# EAGLE board ArduinoMegaConnector (EAGLE 5.07)
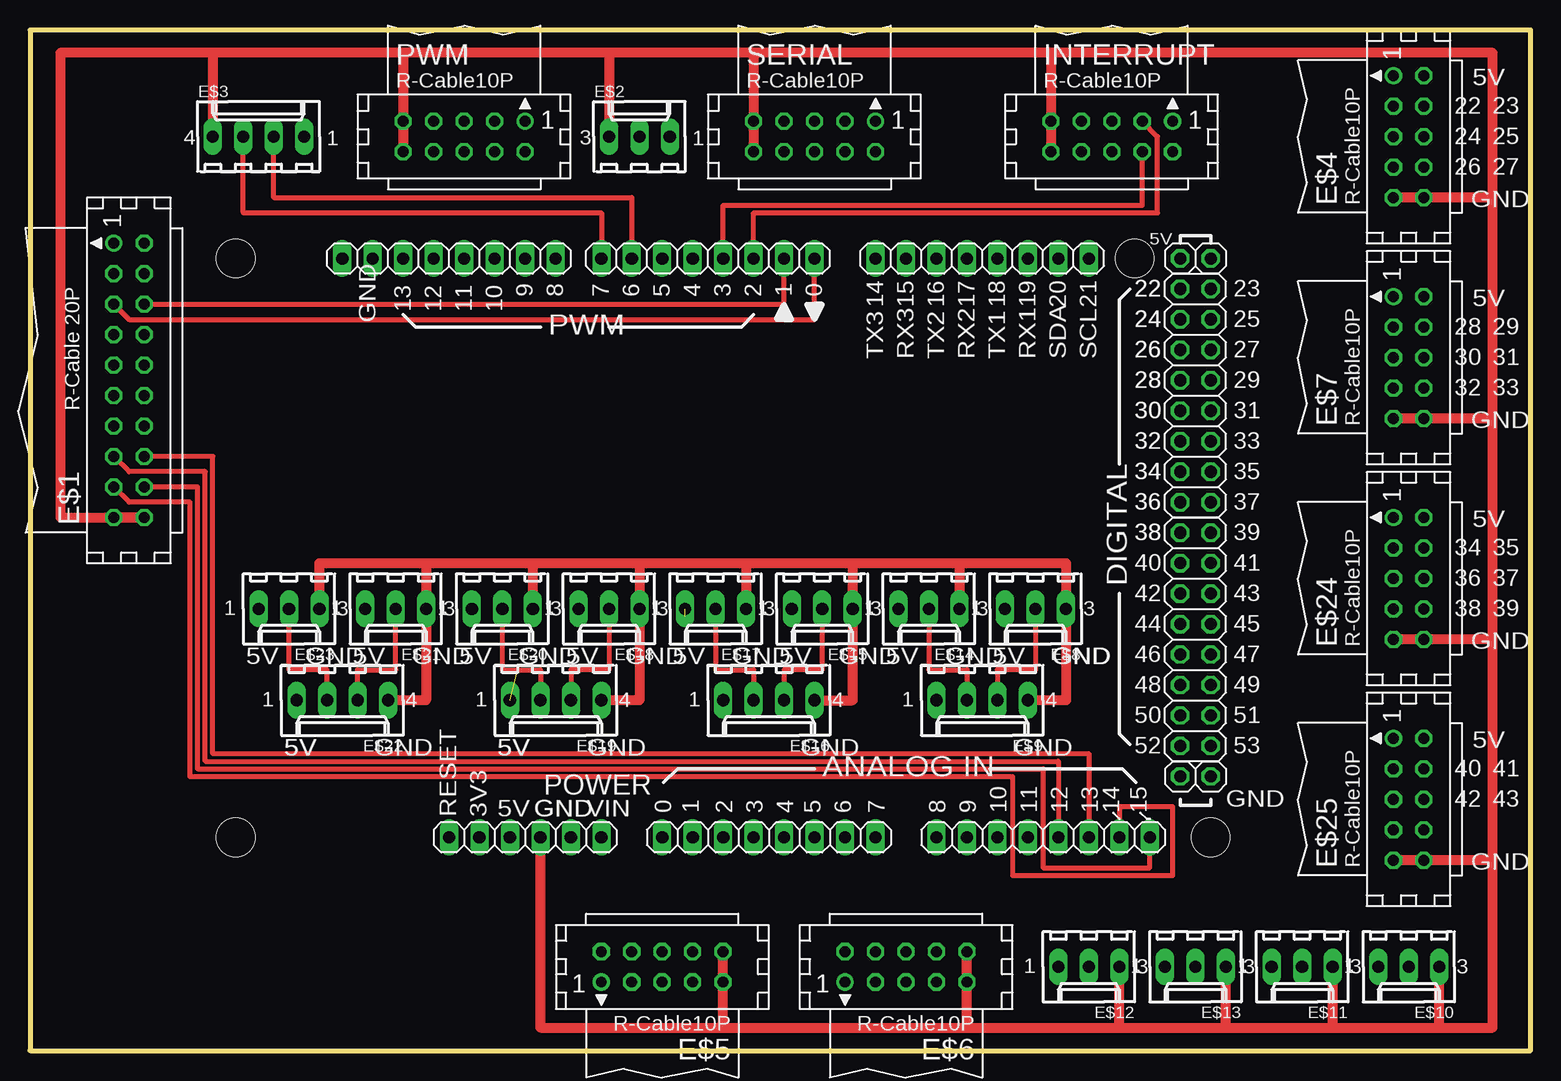
[diagram p0: board, top side]
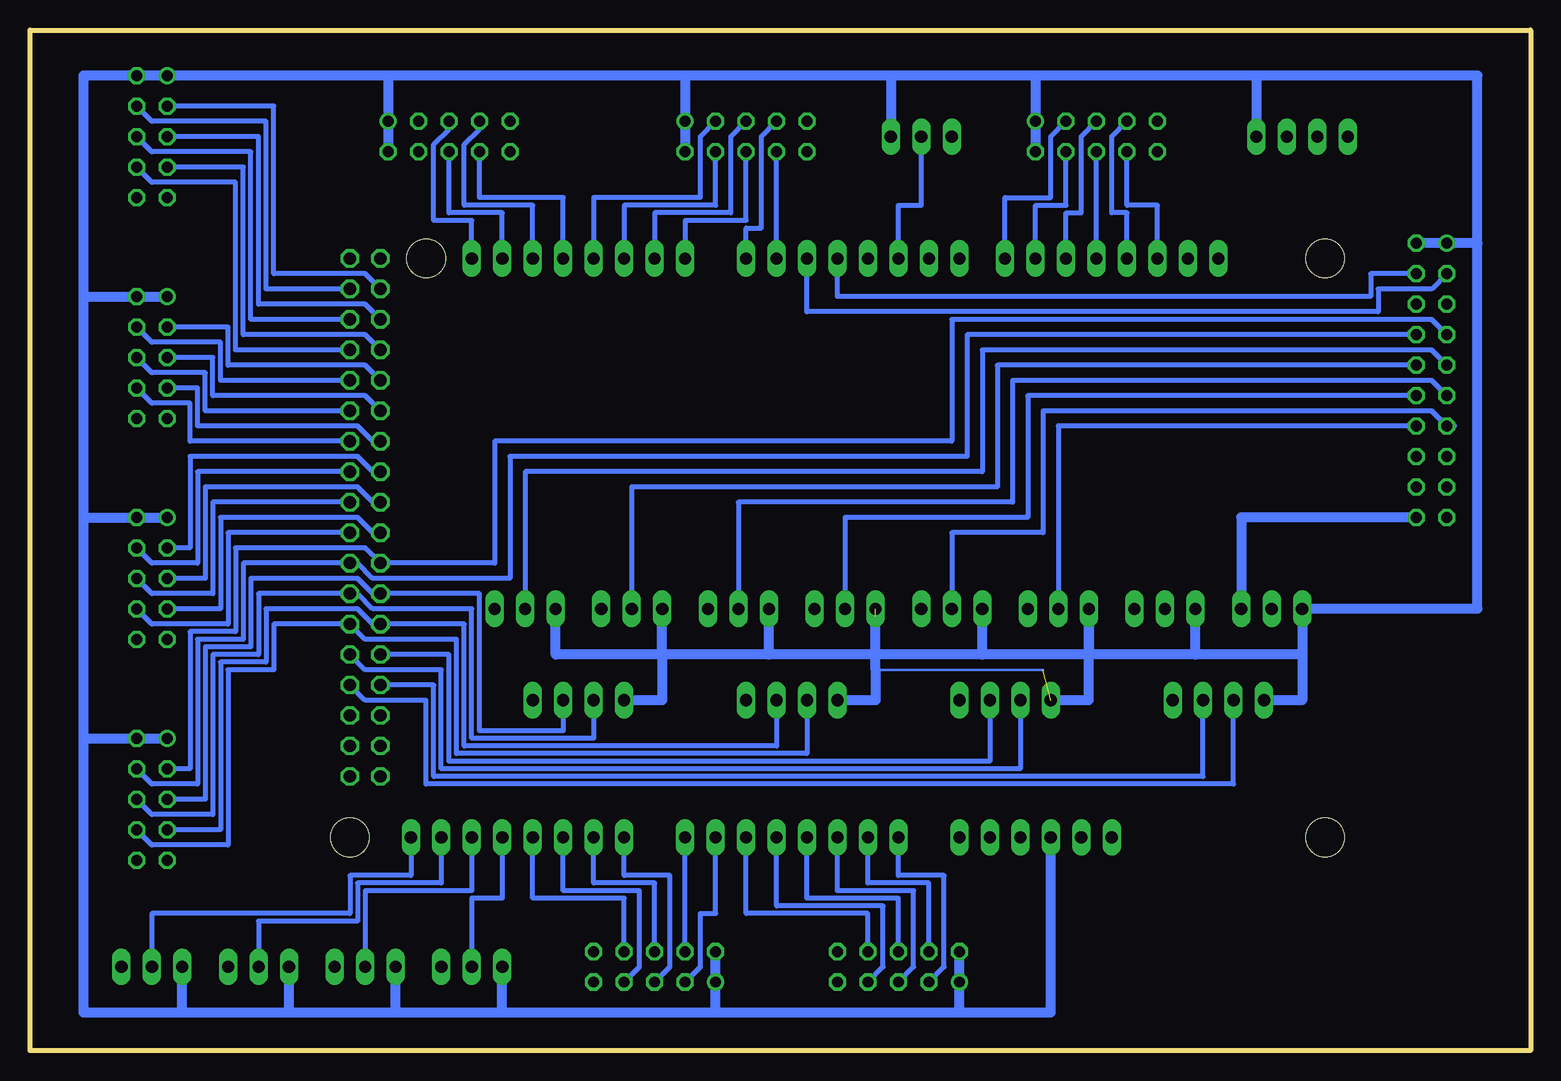
[diagram p1: board, bottom side, seen from below]

Size 125.09 x 85.09 mm. Coordinates in mm from the lower left corner, seen from the top.
Outline: 0,0 125.09,0 125.09,85.09 0,85.09 0,0
Copper layers (1*16): Top 0.035mm / dielectric 1.5mm / Bottom 0.035mm
Design rules "default *": minimum track width 8mil, minimum drill 16mil, track to track 8mil, track to pad 8mil, pad to pad 8mil, via to via 10mil, smd to smd 8mil, copper to edge 40mil, drill to drill 12mil, minimum pad ring 10mil, minimum via ring 10mil, stop-mask expansion 4mil, vias tented up to drill 0mil, thermal gap 10mil
Net classes: 0 default: width 0.203 mm, drill 0.406 mm, clearance 0.203 mm; 1 power: width 0.61 mm, drill 0.711 mm, clearance 0.203 mm; 2 gnd: width 0.305 mm, drill 0.711 mm, clearance 0.203 mm; 3 usbvcc: width 0.508 mm, drill 0.711 mm, clearance 0.203 mm
Holes 3.2 mm at 98.42,17.78 17.14,66.04 92.08,66.04 17.14,17.78

## Footprints (pad centres in the part's own frame; a part is rotated, then mirrored left to right if it is on the bottom)
1X08 = drill 1.016 long: 1 -8.89,0; 2 -6.35,0; 3 -3.81,0; 4 -1.27,0; 5 1.27,0; 6 3.81,0; 7 6.35,0; 8 8.89,0
CON20L = drill 0.914 round: 1 11.43,1.27 | drill 0.914 octagon: 2 11.43,-1.27; 3 8.89,1.27; 4 8.89,-1.27; 5 6.35,1.27; 6 6.35,-1.27; 7 3.81,1.27; 8 3.81,-1.27; 9 1.27,1.27; 10 1.27,-1.27; 11 -1.27,1.27; 12 -1.27,-1.27; 13 -3.81,1.27; 14 -3.81,-1.27; 15 -6.35,1.27; 16 -6.35,-1.27; 17 -8.89,1.27; 18 -8.89,-1.27; 19 -11.43,1.27; 20 -11.43,-1.27
6410-03 = drill 1.016 long: 1 2.54,0; 2 0,0; 3 -2.54,0
6410-04 = drill 1.016 long: 1 3.81,0; 2 1.27,0; 3 -1.27,0; 4 -3.81,0
CON10L = drill 0.914 round: 1 5.08,1.27 | drill 0.914 octagon: 2 5.08,-1.27; 3 2.54,1.27; 4 2.54,-1.27; 5 0,1.27; 6 0,-1.27; 7 -2.54,1.27; 8 -2.54,-1.27; 9 -5.08,1.27; 10 -5.08,-1.27
2X08 = drill 1.016 octagon: 1 -8.89,-1.27; 2 -8.89,1.27; 3 -6.35,-1.27; 4 -6.35,1.27; 5 -3.81,-1.27; 6 -3.81,1.27; 7 -1.27,-1.27; 8 -1.27,1.27; 9 1.27,-1.27; 10 1.27,1.27; 11 3.81,-1.27; 12 3.81,1.27; 13 6.35,-1.27; 14 6.35,1.27; 15 8.89,-1.27; 16 8.89,1.27
1X01 = drill 1.016 octagon: 1 0,0
1X06 = drill 1.016 long: 1 -6.35,0; 2 -3.81,0; 3 -1.27,0; 4 1.27,0; 5 3.81,0; 6 6.35,0

## Placement (x,y rotation side)
ADCH  [1X08]  84.45,17.78 0 top
ADCL  [1X08]  61.59,17.78 0 top
COMMUNICATION  [1X08]  79.38,66.04 180 top
E$1  [CON20L]  8.26,55.88 90 top
E$2  [6410-03]  50.8,76.2 0 top
E$3  [6410-04]  19.05,76.2 0 top
E$4  [CON10L]  114.94,76.2 90 top
E$5  [CON10L]  52.7,6.99 180 top
E$6  [CON10L]  73.03,6.99 180 top
E$7  [CON10L]  114.94,57.78 90 top
E$8  [6410-03]  83.82,36.83 180 top
E$9  [6410-04]  79.38,29.21 180 top
E$10  [6410-03]  114.94,6.99 180 top
E$11  [6410-03]  106.05,6.99 180 top
E$12  [6410-03]  88.27,6.99 180 top
E$13  [6410-03]  97.16,6.99 180 top
E$14  [6410-03]  74.93,36.83 180 top
E$15  [6410-03]  66.04,36.83 180 top
E$16  [6410-04]  61.59,29.21 180 top
E$17  [6410-03]  57.15,36.83 180 top
E$18  [6410-03]  48.26,36.83 180 top
E$19  [6410-04]  43.81,29.21 180 top
E$20  [6410-03]  39.37,36.83 180 top
E$21  [6410-03]  30.48,36.83 180 top
E$22  [6410-04]  26.04,29.21 180 top
E$23  [6410-03]  21.59,36.83 180 top
E$24  [CON10L]  114.94,39.37 90 top
E$25  [CON10L]  114.94,20.95 90 top
INTERRUPT  [CON10L]  90.17,76.2 0 top
JP1  [2X08]  97.16,54.61 90 top
JP2  [2X08]  97.16,34.29 90 top
JP3  [1X01]  95.89,66.04 0 top
JP4  [1X01]  98.42,66.04 0 top
JP5  [1X01]  95.89,22.86 0 top
JP6  [1X01]  98.42,22.86 0 top
POWER  [1X06]  41.27,17.78 0 top
PWM  [CON10L]  36.2,76.2 0 top
PWMH  [1X08]  34.92,66.04 180 top
PWML  [1X08]  56.52,66.04 180 top
SERIAL  [CON10L]  65.41,76.2 0 top

## Library data of the parts
ADCH ADCL COMMUNICATION JP1-JP6 POWER PWMH PWML = pinhead
E$1 E$4-E$7 E$24 E$25 INTERRUPT PWM SERIAL = con-harting
E$2 E$3 E$8-E$23 = con-molex

## Nets
S$2: E$7.3 JP1.10
S$3: PWM.3 PWMH.1
S$4: PWM.4 PWMH.2
S$5: PWM.5 PWMH.3
S$6: PWM.6 PWMH.4
S$7: PWM.7 PWMH.5
S$8: PWM.8 PWMH.6
S$9: E$1.1 E$1.2 E$2.1 E$3.1 E$4.1 E$4.2 E$5.1 E$5.2 E$6.1 E$6.2 E$7.1 E$7.2 E$8.1 E$9.1 E$10.1 E$11.1 E$12.1 E$13.1 E$14.1 E$15.1 E$16.1 E$17.1 E$18.1 E$19.1 E$20.1 E$21.1 E$22.1 E$23.1 E$24.1 E$24.2 E$25.1 E$25.2 INTERRUPT.1 INTERRUPT.2 POWER.3 PWM.1 PWM.2 SERIAL.1 SERIAL.2
S$10: E$1.3 INTERRUPT.3 PWML.3
S$11: E$1.4 INTERRUPT.4 PWML.4
S$12: COMMUNICATION.1 INTERRUPT.5
S$13: COMMUNICATION.2 INTERRUPT.6
S$14: COMMUNICATION.3 INTERRUPT.7
S$15: COMMUNICATION.4 INTERRUPT.8
S$16: ADCH.5 E$1.15 E$12.2
S$17: COMMUNICATION.5 SERIAL.3
S$19: COMMUNICATION.7 SERIAL.5
S$20: COMMUNICATION.8 SERIAL.6
S$22: COMMUNICATION.6 SERIAL.4
S$23: E$4.3 JP1.16
S$24: E$4.4 JP1.15
S$25: E$4.5 JP1.14
S$26: E$4.6 JP1.13
S$27: E$4.7 JP1.12
S$28: E$4.8 JP1.11
S$29: ADCH.6 E$1.16 E$13.2
S$32: E$7.4 JP1.9
S$33: E$7.5 JP1.8
S$34: E$7.6 JP1.7
S$35: E$7.7 JP1.6
S$36: E$7.8 JP1.5
S$37: ADCL.1 E$5.3
S$38: ADCL.2 E$5.4
S$39: ADCL.3 E$5.5
S$40: ADCL.4 E$5.6
S$41: ADCL.5 E$5.7
S$42: ADCL.6 E$5.8
S$43: ADCL.7 E$6.3
S$44: ADCL.8 E$6.4
S$45: ADCH.1 E$6.5
S$46: ADCH.2 E$6.6
S$47: ADCH.3 E$6.7
S$48: ADCH.4 E$6.8
S$49: ADCH.7 E$1.17 E$11.2
S$50: ADCH.8 E$1.18 E$10.2
S$51: E$1.9 E$8.2 E$9.3 E$25.5 JP2.12
S$52: E$1.10 E$9.2 E$14.2 E$25.6 JP2.11
S$53: E$1.11 E$15.2 E$16.3 E$25.7 JP2.10
S$54: E$1.12 E$16.2 E$17.2 E$25.8 JP2.9
S$55: E$2.2 PWML.6
S$57: E$1.19 E$1.20 E$2.3 E$3.4 E$4.9 E$4.10 E$5.9 E$5.10 E$6.9 E$6.10 E$7.9 E$7.10 E$8.3 E$9.4 E$10.3 E$11.3 E$12.3 E$13.3 E$14.3 E$15.3 E$16.4 E$17.3 E$18.3 E$19.4 E$20.3 E$21.3 E$22.4 E$23.3 E$24.9 E$24.10 E$25.9 E$25.10 INTERRUPT.9 INTERRUPT.10 POWER.4 PWM.9 PWM.10 SERIAL.9 SERIAL.10
S$58: E$1.5 PWML.1 SERIAL.7
S$59: E$3.2 PWML.7
S$60: E$24.3 JP1.4
S$61: E$24.4 JP1.3
S$62: E$24.5 JP1.2
S$63: E$24.6 JP1.1
S$64: E$24.7 JP2.16
S$65: E$24.8 JP2.15
S$66: E$1.7 E$25.3 JP2.14
S$67: E$1.8 E$25.4 JP2.13
S$68: E$21.2 E$22.3 JP2.6
S$69: E$22.2 E$23.2 JP2.5
S$70: E$1.14 E$19.2 E$20.2 JP2.7
S$71: E$1.13 E$18.2 E$19.3 JP2.8
S$72: E$3.3 PWML.8
S$73: E$1.6 PWML.2 SERIAL.8

## Tracks (layer width: path | path; a pad name or v marks a point on that pad's centre or on a via)
S$2
  Bottom 0.406: JP1.10 97.16,57.15 108.58,57.15 108.58,60.33 E$7.3
S$3
  Bottom 0.406: PWMH.1 43.81,71.12 40.01,71.12 40.01,76.2 PWM.3
S$4
  Bottom 0.406: PWMH.2 41.27,70.48 38.73,70.48 PWM.4
S$5
  Bottom 0.406: PWMH.3 38.73,69.85 37.47,69.85 37.47,76.2 PWM.5
S$6
  Bottom 0.406: PWMH.4 PWM.6
S$7
  Bottom 0.406: PWMH.5 33.66,69.85 34.92,69.85 34.92,76.2 PWM.7
S$8
  Bottom 0.406: PWMH.6 31.11,70.48 33.66,70.48 PWM.8
S$9  (2 unrouted)
  Bottom 0.203: POWER.3 39.37,17.78 | 40.64,31.75 54.61,31.75
  Bottom 0.813: POWER.3 40.01,3.17 47.62,3.17 | 103.5,3.17 E$11.1 | 103.5,3.17 94.61,3.17 | 94.61,3.17 E$13.1 | 94.61,3.17 85.72,3.17 | 85.72,3.17 E$12.1 | 85.72,3.17 67.94,3.17 | 67.94,3.17 E$6.1 E$6.2 | E$5.2 E$5.1 47.62,3.17 | 67.94,3.17 47.62,3.17 | 112.39,3.17 E$10.1 | 112.39,3.17 103.5,3.17 | E$25.1 E$25.2 120.65,26.04 | 36.83,33.02 E$20.1 36.83,29.21 E$19.1 | 120.65,26.04 120.65,3.17 112.39,3.17 | E$24.1 E$24.2 120.65,44.45 | 120.65,44.45 120.65,26.04 | E$7.1 E$7.2 120.65,62.87 | 120.65,62.87 120.65,44.45 | 120.65,62.87 120.65,81.28 E$4.2 E$4.1 95.25,81.28 | E$16.1 54.61,29.21 54.61,31.75 E$17.1 | INTERRUPT.2 INTERRUPT.1 95.25,81.28 | E$8.1 81.28,33.02 72.39,33.02 | SERIAL.2 SERIAL.1 70.48,81.28 | 70.48,81.28 95.25,81.28 | 63.5,33.02 E$15.1 | 63.5,33.02 72.39,33.02 | 54.61,33.02 54.61,36.2 | 54.61,33.02 63.5,33.02 | PWM.2 PWM.1 41.27,81.28 | 53.34,81.28 70.48,81.28 | 53.34,81.28 E$2.1 | 41.27,81.28 53.34,81.28 | 45.72,33.02 E$18.1 | 45.72,33.02 54.61,33.02 | 27.94,33.02 E$21.1 | 27.94,33.02 45.72,33.02 | 22.86,81.28 E$3.1 | 22.86,81.28 41.27,81.28 | E$1.2 E$1.1 4.45,67.31 | 22.86,81.28 4.45,81.28 4.45,67.31 | 27.94,33.02 19.05,33.02 E$23.1 | E$22.1 19.05,29.21 E$23.1 | 4.45,67.31 4.45,36.83 E$23.1 | 72.39,33.02 E$14.1 | E$9.1 72.39,29.21 72.39,33.02
S$10
  Top 0.406: PWML.3 60.33,69.85 93.98,69.85 93.98,76.2 INTERRUPT.3
  Bottom 0.406: E$1.3 8.26,63.5 12.7,63.5 12.7,61.59 60.33,61.59 PWML.3
S$11
  Top 0.406: PWML.4 57.78,70.48 92.71,70.48 INTERRUPT.4
  Bottom 0.406: PWML.4 57.78,62.87 13.34,62.87 13.34,64.77 E$1.4
S$12
  Bottom 0.406: COMMUNICATION.1 88.27,69.22 91.44,69.22 91.44,75.56 90.17,76.83 INTERRUPT.5
S$13
  Bottom 0.406: COMMUNICATION.2 85.72,69.85 90.17,69.85 INTERRUPT.6
S$14
  Bottom 0.406: COMMUNICATION.3 83.19,70.48 88.9,70.48 88.9,75.56 87.63,76.83 INTERRUPT.7
S$15
  Bottom 0.406: COMMUNICATION.4 80.64,71.12 87.63,71.12 INTERRUPT.8
S$16
  Top 0.406: E$1.15 8.26,48.26 14.61,48.26 14.61,24.13 85.72,24.13 ADCH.5
  Bottom 0.406: ADCH.5 85.72,12.7 88.27,12.7 E$12.2
S$17
  Bottom 0.406: COMMUNICATION.5 78.11,71.12 69.22,71.12 69.22,76.2 SERIAL.3
S$19
  Bottom 0.406: COMMUNICATION.7 73.03,69.85 66.67,69.85 66.67,76.2 SERIAL.5
S$20
  Bottom 0.406: COMMUNICATION.8 70.48,69.22 65.41,69.22 SERIAL.6
S$22
  Bottom 0.406: 75.56,67.31 COMMUNICATION.6 75.56,70.48 67.94,70.48 SERIAL.4
S$23
  Bottom 0.406: JP1.16 97.16,64.77 104.78,64.77 104.78,78.74 E$4.3
S$24
  Bottom 0.406: E$4.4 114.94,77.47 105.41,77.47 105.41,63.5 JP1.15
S$25
  Bottom 0.406: JP1.14 97.16,62.23 106.05,62.23 106.05,76.2 E$4.5
S$26
  Bottom 0.406: E$4.6 114.94,74.93 106.68,74.93 106.68,60.96 JP1.13
S$27
  Bottom 0.406: JP1.12 97.16,59.69 107.31,59.69 107.31,73.66 E$4.7
S$28
  Bottom 0.406: E$4.8 114.94,72.39 107.95,72.39 107.95,58.42 JP1.11
S$29
  Top 0.406: E$1.16 15.24,49.53 15.24,24.77 88.27,24.77 ADCH.6
  Bottom 0.406: ADCH.6 88.27,13.34 97.16,13.34 E$13.2
S$32
  Bottom 0.406: E$7.4 114.94,59.05 109.22,59.05 109.22,55.88 JP1.9
S$33
  Bottom 0.406: JP1.8 97.16,54.61 109.86,54.61 109.86,57.78 E$7.5
S$34
  Bottom 0.406: E$7.6 114.94,56.52 110.49,56.52 110.49,53.34 JP1.7
S$35
  Bottom 0.406: JP1.6 96.52,50.8 97.79,52.07 111.12,52.07 111.12,55.24 E$7.7
S$36
  Bottom 0.406: E$7.8 114.94,53.98 111.76,53.98 111.76,50.8 JP1.5
S$37
  Bottom 0.406: ADCL.1 52.7,14.61 48.9,14.61 48.9,6.99 E$5.3
S$38
  Bottom 0.406: ADCL.2 55.24,13.97 50.16,13.97 E$5.4
S$39
  Bottom 0.406: ADCL.3 57.78,13.34 51.44,13.34 51.44,6.99 E$5.5
S$40
  Bottom 0.406: ADCL.4 60.33,12.7 52.7,12.7 E$5.6
S$41
  Bottom 0.406: ADCL.5 62.87,12.06 53.98,12.06 53.98,6.99 E$5.7
S$42
  Bottom 0.406: ADCL.6 65.41,11.43 55.24,11.43 E$5.8
S$43
  Bottom 0.406: ADCL.7 67.94,11.43 69.22,11.43 69.22,6.99 E$6.3
S$44
  Bottom 0.406: E$6.4 ADCL.8
S$45
  Bottom 0.406: ADCH.1 75.56,14.61 71.75,14.61 71.75,6.99 E$6.5
S$46
  Bottom 0.406: ADCH.2 78.11,13.97 73.03,13.97 E$6.6
S$47
  Bottom 0.406: ADCH.3 80.64,13.34 74.3,13.34 74.3,6.99 E$6.7
S$48
  Bottom 0.406: ADCH.4 83.19,12.7 75.56,12.7 E$6.8
S$49
  Top 0.406: E$1.17 8.26,45.72 13.34,45.72 13.34,22.86 81.92,22.86 81.92,14.61 95.25,14.61 95.25,20.32 90.81,20.32 ADCH.7
  Bottom 0.406: ADCH.7 90.81,13.97 97.79,13.97 97.79,10.79 106.05,10.79 E$11.2
S$50
  Top 0.406: ADCH.8 93.34,15.24 84.45,15.24 84.45,23.5 13.97,23.5 13.97,46.99 E$1.18
  Bottom 0.406: E$10.2 114.94,11.43 98.42,11.43 98.42,14.61 93.34,14.61 ADCH.8
S$51
  Top 0.406: E$8.2 83.82,31.75 80.64,31.75 E$9.3
  Bottom 0.406: E$9.3 80.64,26.67 87.63,26.67 87.63,38.1 JP2.12 96.52,38.1 97.79,39.37 106.68,39.37 106.68,33.66 110.49,33.66 110.49,20.95 E$25.5 | E$1.9 8.26,58.42 45.72,58.42 45.72,48.26 83.82,48.26 E$8.2
S$52
  Top 0.406: E$9.2 78.11,31.75 74.93,31.75 E$14.2
  Bottom 0.406: E$25.6 114.94,19.68 109.86,19.68 109.86,33.02 106.05,33.02 106.05,38.1 JP2.11 97.79,38.1 96.52,36.83 88.27,36.83 88.27,26.04 78.11,26.04 E$9.2 | E$1.10 44.45,57.15 44.45,46.99 74.93,46.99 E$14.2
S$53
  Top 0.406: E$15.2 66.04,31.75 62.87,31.75 E$16.3
  Bottom 0.406: E$16.3 62.87,25.4 88.9,25.4 88.9,35.56 JP2.10 96.52,35.56 97.79,36.83 105.41,36.83 105.41,32.38 109.22,32.38 109.22,18.41 E$25.7 | E$1.11 8.26,55.88 43.18,55.88 43.18,45.72 66.04,45.72 E$15.2
S$54
  Top 0.406: E$16.2 60.33,31.75 57.15,31.75 E$17.2
  Bottom 0.406: E$25.8 114.94,17.14 108.58,17.14 108.58,31.75 104.78,31.75 104.78,35.56 JP2.9 97.16,34.29 89.53,34.29 89.53,24.77 60.33,24.77 E$16.2 | E$1.12 41.91,54.61 41.91,44.45 57.15,44.45 E$17.2
S$55
  Bottom 0.406: E$2.2 50.8,70.48 52.7,70.48 PWML.6
S$57
  Top 0.813: E$25.9 E$25.10 121.92,15.88 | E$4.9 E$4.10 121.92,71.12 | 121.92,71.12 121.92,83.19 85.09,83.19 | 121.92,52.7 121.92,71.12 | E$7.9 E$7.10 121.92,52.7 | 121.92,34.29 121.92,52.7 | E$24.9 E$24.10 121.92,34.29 | 121.92,15.88 121.92,34.29 | 31.11,83.19 PWM.9 PWM.10 | 60.33,83.19 48.26,83.19 | 48.26,83.19 31.11,83.19 | 60.33,83.19 SERIAL.9 SERIAL.10 | 85.09,83.19 INTERRUPT.9 INTERRUPT.10 | 85.09,83.19 60.33,83.19 | 121.92,15.88 121.92,1.91 117.47,1.91 | 117.47,1.91 E$10.3 | 108.58,1.91 117.47,1.91 | 108.58,1.91 E$11.3 | 57.78,1.91 E$5.9 E$5.10 | 57.78,1.91 42.55,1.91 POWER.4 | 57.78,1.91 78.11,1.91 | 78.11,1.91 E$6.9 E$6.10 | 78.11,1.91 90.81,1.91 | 90.81,1.91 E$12.3 | 90.81,1.91 99.69,1.91 | 99.69,1.91 E$13.3 | 99.69,1.91 108.58,1.91 | E$1.19 E$1.20 2.54,44.45 2.54,83.19 15.24,83.19 | 15.24,83.19 E$3.4 | 31.11,83.19 15.24,83.19 | 48.26,83.19 E$2.3 | E$9.4 86.36,29.21 E$8.3 86.36,40.64 77.47,40.64 | E$16.4 68.58,29.21 E$15.3 68.58,40.64 | E$19.4 50.8,29.21 E$18.3 50.8,40.64 | E$22.4 33.02,29.21 E$21.3 33.02,40.64 | E$23.3 24.13,40.64 33.02,40.64 | 41.91,40.64 E$20.3 | 33.02,40.64 41.91,40.64 | 41.91,40.64 50.8,40.64 | 59.69,40.64 E$17.3 | 50.8,40.64 59.69,40.64 | 59.69,40.64 68.58,40.64 | 77.47,40.64 E$14.3 | 68.58,40.64 77.47,40.64
  Bottom 0.813: E$1.20 24.13,44.45 E$23.3
S$58
  Top 0.406: E$1.5 8.26,60.96 65.41,60.96 PWML.1
  Bottom 0.406: PWML.1 65.41,68.58 64.14,68.58 64.14,76.2 SERIAL.7
S$59
  Top 0.203: 20.32,74.93 E$3.2
  Top 0.406: PWML.7 50.16,71.12 20.32,71.12 20.32,74.93 20.32,75.56
S$60
  Bottom 0.406: JP1.4 96.52,48.26 97.79,49.53 111.76,49.53 111.76,41.91 E$24.3
S$61
  Bottom 0.406: JP1.3 111.12,48.26 111.12,40.64 114.94,40.64 E$24.4
S$62
  Bottom 0.406: JP1.2 96.52,45.72 97.79,46.99 110.49,46.99 110.49,39.37 E$24.5
S$63
  Bottom 0.406: E$24.6 114.94,38.1 109.86,38.1 109.86,45.72 JP1.1
S$64
  Bottom 0.406: JP2.16 96.52,43.18 97.79,44.45 109.22,44.45 109.22,36.83 E$24.7
S$65
  Bottom 0.406: E$24.8 114.94,35.56 108.58,35.56 108.58,43.18 JP2.15
S$66
  Bottom 0.406: E$25.3 111.76,23.5 111.76,34.92 107.95,34.92 107.95,41.91 97.16,41.91 JP2.14 86.36,40.64 86.36,50.8 48.26,50.8 48.26,60.96 8.26,60.96 E$1.7
S$67
  Bottom 0.406: E$25.4 114.94,22.23 111.12,22.23 111.12,34.29 107.31,34.29 107.31,40.64 JP2.13 97.79,40.64 96.52,39.37 85.09,39.37 85.09,49.53 46.99,49.53 46.99,59.69 E$1.8
S$68
  Top 0.406: E$21.2 30.48,31.75 27.3,31.75 E$22.3
  Bottom 0.406: JP2.6 91.44,30.48 91.44,22.86 27.3,22.86 E$22.3
S$69
  Top 0.406: E$22.2 24.77,31.75 21.59,31.75 E$23.2
  Bottom 0.406: E$22.2 24.77,22.23 92.08,22.23 92.08,29.21 97.16,29.21 JP2.5
S$70
  Top 0.406: E$19.2 42.55,31.75 39.37,31.75 E$20.2
  Bottom 0.406: E$19.2 42.55,23.5 90.81,23.5 90.81,31.75 97.16,31.75 JP2.7 | E$1.14 39.37,52.07 E$20.2
S$71
  Top 0.406: E$18.2 48.26,31.75 45.09,31.75 E$19.3
  Bottom 0.406: JP2.8 90.17,33.02 90.17,24.13 45.09,24.13 E$19.3 | 6.35,52.07 E$1.13 8.26,53.34 40.64,53.34 40.64,43.18 48.26,43.18 E$18.2
S$72
  Top 0.406: PWML.8 47.62,69.85 17.78,69.85 E$3.3
S$73
  Top 0.406: PWML.2 62.87,62.23 E$1.6
  Bottom 0.406: PWML.2 SERIAL.8

## Text on the board
tPlace: 5V | 22 | 23 | 24 | 25 | 26 | 27 | GND | 5V | 9 | 8 | 7 | 6 | 5 | 4 | 3 | 2 | 1 | 0 | 22 | 22 | 23 | 13 | 12 | 11 | 10 | 14 | 15 | 16 | 17 | 18 | 19 | 20 | 21 | 5V | 24 | 24 | 25 | 28 | 29 | TX3 | RX3 | TX2 | RX2 | TX1 | RX1 | SDA | SCL | 26 | 26 | 27 | 30 | 31 | 28 | 28 | 29 | 32 | 33 | 30 | 30 | 31 | GND | 32 | 32 | 33 | 34 | 34 | 35 | 36 | 36 | 37 | 5V | 38 | 38 | 39 | 34 | 35 | 40 | 41 | DIGITAL | 36 | 37 | 42 | 43 | 38 | 39 | 44 | 45 | GND | 5V | GND | 5V | GND | 5V | GND | 5V | GND | 5V | GND | 5V | GND | 5V | GND | 5V | GND | GND | 46 | 47 | 48 | 49 | 50 | 51 | 5V | GND | 5V | 5V | GND | GND | GND | 52 | 53 | 5V | ANALOG IN | 40 | 41 | 5V | GND | GND | VIN | 0 | 1 | 2 | 3 | 4 | 5 | 6 | 7 | 8 | 9 | 10 | 11 | 12 | 13 | 14 | 15 | GND | 42 | 43 | RESET | 3V3 | GND
tNames: GND | PWM | GND | GND | 5V